# EAGLE board Orbit I_AnalougeEngine_V1_0 (EAGLE 8.4.1)
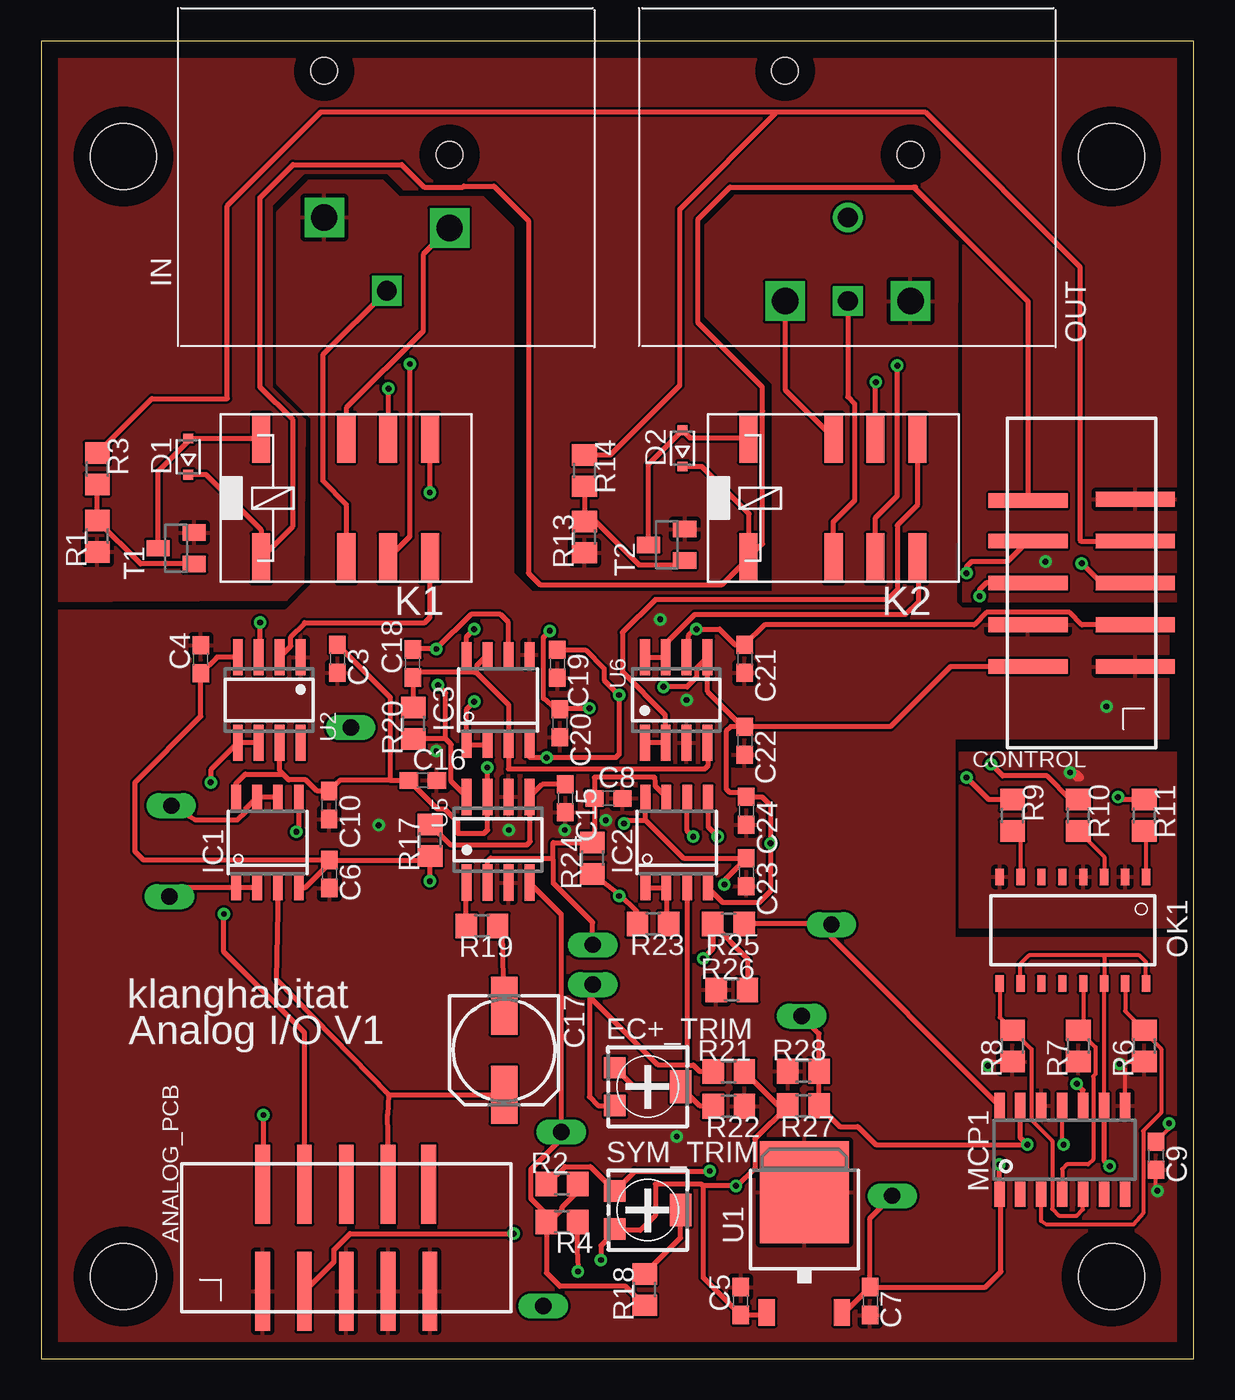
[diagram p0: board, top side]
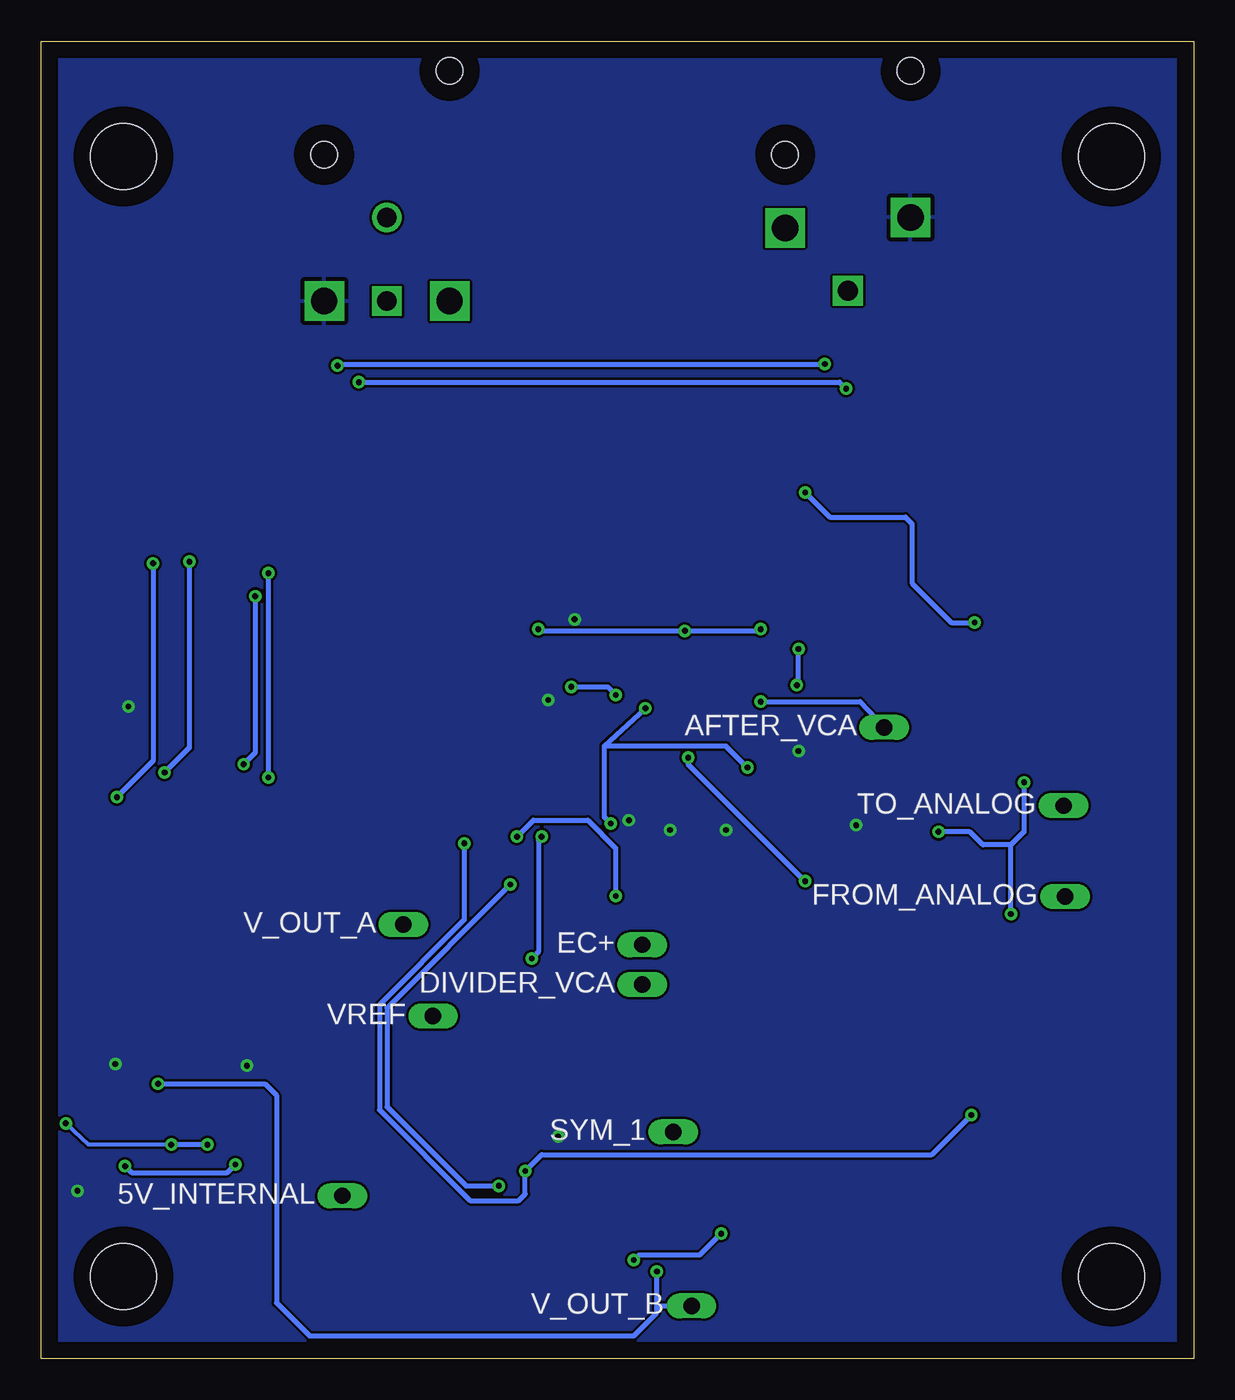
[diagram p1: board, bottom side, seen from below]

Size 70 x 80 mm. Coordinates in mm from the lower left corner, seen from the top.
Outline: 0,0 70,0 70,80 0,80 0,0
Copper layers (1*16): Top 0.035mm / dielectric 1.5mm / Bottom 0.035mm
Design rules "default": minimum track width 6mil, minimum drill 0.35mm, track to track 6mil, track to pad 6mil, pad to pad 6mil, via to via 6mil, smd to smd 6mil, copper to edge 40mil, drill to drill 6mil, minimum pad ring 10mil, minimum via ring 8mil, stop-mask expansion 4mil, vias tented up to drill 0mil, thermal gap 10mil
Holes 4 mm at 5,73 65,73 65,5 5,5

## Footprints (pad centres in the part's own frame; a part is rotated, then mirrored left to right if it is on the bottom)
THT_PIN = drill 1 long: P$1 0,0
87832-10 = smd 0.89 x 4.8: 1 -5.08,-3.251; 2 -5.08,3.249; 3 -2.54,-3.251; 4 -2.54,3.249; 5 0,-3.251; 6 0,3.249; 7 2.54,-3.251; 8 2.54,3.249; 9 5.08,-3.251; 10 5,3.249
C0603 = smd 1.1 x 1: 1 -0.85,0; 2 0.85,0
153CLV-0605 = smd 3.5 x 1.6: + 2.7,0; - -2.7,0
SOD323-R = smd 0.6 x 0.6: A 1.1,0; C -1.1,0
RTRIM4G/J = smd 1.3 x 1.3: 1 1.15,-2; 3 -1.15,-2 | smd 2 x 1.3: 2 0,2
SOIC8 = smd 0.6 x 1.5: 1 -1.905,-2.75; 2 -0.635,-2.75; 3 0.635,-2.75; 4 1.905,-2.75; 5 1.905,2.75; 6 0.635,2.75; 7 -0.635,2.75; 8 -1.905,2.75
NEUTRIK_NC3FAH = drill 1.6 square: 1 -3.81,-12.7; 2 3.81,-13.335 | drill 1.2 square: 3 0,-17.15 | hole 1.6: -3.81,-3.81; 3.81,-8.89
351 = smd 1.11 x 3: 1 -2.623,-3.645; 2 -2.623,3.645; P1 2.556,-3.645; P2 2.556,3.645; Q1 5.096,-3.645; Q2 5.096,3.645; S1 7.636,-3.645; S2 7.636,3.645
SOIC16 = smd 0.635 x 1.524: 1 -4.445,-2.695; 2 -3.175,-2.695; 3 -1.905,-2.695; 4 -0.635,-2.695; 5 0.635,-2.695; 6 1.905,-2.695; 7 3.175,-2.695; 8 3.175,2.695; 9 1.905,2.695; 10 0.635,2.695; 11 -0.635,2.695; 12 -1.905,2.695; 13 -3.175,2.695; 14 -4.445,2.695
SOIC16' = smd 1 x 0.5: 1 -3.24,4.445; 2 -3.24,3.175; 3 -3.24,1.905; 4 -3.24,0.635; 5 -3.24,-0.635; 6 -3.24,-1.905; 7 -3.24,-3.175; 8 -3.24,-4.445; 9 3.24,-4.445; 10 3.24,-3.175; 11 3.24,-1.905; 12 3.24,-0.635; 13 3.24,0.635; 14 3.24,1.905; 15 3.24,3.175; 16 3.24,4.445
NEUTRIK_NC3MAH = drill 1.6 square: 1 3.81,-17.78; 2 -3.81,-17.78 | drill 1.2 square: 3 0,-17.78 | drill 1.2: G 0,-12.7 | hole 1.6: -3.81,-3.8; 3.81,-8.89
R0805 = smd 1.3 x 1.5: 1 -0.95,0; 2 0.95,0
SOT23 = smd 1 x 1.4: 1 -0.95,-1.1; 2 0.95,-1.1; 3 0,1.1
TO252 = smd 1 x 1.6: 1 -2.28,-4.8; 3 2.28,-4.8 | smd 5.4 x 6.2: 2 0,2.5
SO08 = smd 0.6 x 2.2: 1 -1.905,-2.6; 2 -0.635,-2.6; 3 0.635,-2.6; 4 1.905,-2.6; 5 1.905,2.6; 6 0.635,2.6; 7 -0.635,2.6; 8 -1.905,2.6

## Placement (x,y rotation side)
5V_INTERNAL  TPTHT  [THT_PIN]  51.7,9.9 180 bottom
AFTER_VCA  TPTHT  [THT_PIN]  18.8,38.34 180 bottom
ANALOG_PCB  10PIN_HEADER_SMD  [87832-10]  18.53,7.35 0 top
C3  100nF  [C0603]  18,42.51 270 top
C4  100nF  [C0603]  9.7,42.47 90 top
C5  0.33uF  [C0603]  42.49,3.51 90 top
C6  100nF  [C0603]  17.51,29.43 270 top
C7  100nF  [C0603]  50.35,3.51 270 top
C8  100nF  [C0603]  34.46,34.03 0 top
C9  100nF  [C0603]  67.71,12.33 270 top
C10  100nF  [C0603]  17.49,33.62 270 top
C15  100nF  [C0603]  31.84,34.03 270 top
C16  100nF  [C0603]  23.18,35.11 0 top
C17  10uF  [153CLV-0605]  28.12,18.73 270 top
C18  100nF  [C0603]  22.58,42.22 90 top
C19  100nF  [C0603]  31.36,42.19 270 top
C20  100nF  [C0603]  31.5,38.58 270 top
C21  100nF  [C0603]  42.73,42.5 270 top
C22  100nF  [C0603]  42.73,37.54 270 top
C23  100nF  [C0603]  42.83,29.55 270 top
C24  100nF  [C0603]  42.83,33.27 270 top
CONTROL  10PIN_HEADER_SMD  [87832-10]  63.19,47.11 90 top
D1  4148  [SOD323-R]  8.94,54.78 90 top
D2  4148  [SOD323-R]  38.96,55.28 90 top
DIVIDER_VCA  TPTHT  [THT_PIN]  33.5,22.72 180 bottom
EC+  TPTHT  [THT_PIN]  33.5,25.14 180 bottom
EC+_TRIM  2k  [RTRIM4G/J]  36.84,16.52 270 top
FROM_ANALOG  TPTHT  [THT_PIN]  7.8,28.06 180 bottom
IC1  TL072  [SOIC8]  13.75,31.35 0 top
IC2  TL072  [SOIC8]  38.6,31.35 0 top
IC3  OP275  [SOIC8]  27.75,40 0 top
IN  NEUTRIK_NC3FAH  [NEUTRIK_NC3FAH]  21,82 0 top
K1  RELAY_EE2-5NU  [351]  15.98,52.26 0 top
K2  RELAY_EE2-5NU  [351]  45.58,52.26 0 top
MCP1  MCP4922  [SOIC16]  62.65,12.68 0 top
OK1  OPTOKOPPLER(4X)  [SOIC16']  62.66,26.02 270 top
OUT  NEUTRIK_NC3MAH  [NEUTRIK_NC3MAH]  49,82 0 top
R1  10k  [R0805]  3.41,49.95 90 top
R2  160k  [R0805]  31.64,10.62 0 top
R3  10k  [R0805]  3.41,54.04 270 top
R4  27k  [R0805]  31.64,8.31 180 top
R6  100k  [R0805]  67,19 90 top
R7  100k  [R0805]  63,19 90 top
R8  100k  [R0805]  59,19 90 top
R9  220  [R0805]  59,33 270 top
R10  220  [R0805]  63,33 270 top
R11  220  [R0805]  67,33 270 top
R13  10k  [R0805]  33,49.89 90 top
R14  10k  [R0805]  33,53.93 270 top
R17  5k1  [R0805]  23.63,31.49 90 top
R18  680k  [R0805]  36.65,4.2 90 top
R19  20k  [R0805]  26.77,26.29 180 top
R20  20k  [R0805]  22.61,38.58 90 top
R21  100k  [R0805]  41.77,17.44 0 top
R22  5k1  [R0805]  41.77,15.34 180 top
R23  20k  [R0805]  37.17,26.4 180 top
R24  20k  [R0805]  33.48,30.39 90 top
R25  20k  [R0805]  41.75,26.4 180 top
R26  20k  [R0805]  41.95,22.4 0 top
R27  100k  [R0805]  46.3,15.37 180 top
R28  15k  [R0805]  46.3,17.46 0 top
SYM_1  TPTHT  [THT_PIN]  31.6,13.78 180 bottom
SYM_TRIM  50k  [RTRIM4G/J]  36.85,9.04 270 top
T1  BC847  [SOT23]  8.2,49.21 90 top
T2  BC847  [SOT23]  37.99,49.42 90 top
TO_ANALOG  TPTHT  [THT_PIN]  7.9,33.58 180 bottom
U1  7805  [TO252]  46.36,7.62 0 top
U2  1240  [SO08]  13.85,40 180 top
U5  2181  [SO08]  27.75,31.51 0 top
U6  1646  [SO08]  38.57,40 0 top
V_OUT_A  TPTHT  [THT_PIN]  48,26.36 180 bottom
V_OUT_B  TPTHT  [THT_PIN]  30.5,3.22 180 bottom
VREF  TPTHT  [THT_PIN]  46.2,20.8 180 bottom

## Library data of the parts
5V_INTERNAL AFTER_VCA ANALOG_PCB C3-C10 C15-C24 CONTROL D1 D2 DIVIDER_VCA EC+ EC+_TRIM FROM_ANALOG IC1-IC3 IN OUT R1-R4 R6-R11 R13 R14 R17-R28 SYM_1 SYM_TRIM T1 T2 TO_ANALOG U1 V_OUT_A V_OUT_B VREF = C_Sager_Bibliothek
K1 K2 OK1 = C_Sager_Bibliothek; OC_FARNELL: unknown; OC_NEWARK: unknown
MCP1 = SPI
U2 U5 U6 = THAT_Library

## Nets
5VREG.: 5V_INTERNAL.P$1 C7.1 MCP1.1 MCP1.9 OK1.10 OK1.14 OK1.16 U1.3
+5V: CONTROL.10 D1.C D2.C K1.1 K2.1
AGND: ANALOG_PCB.1 ANALOG_PCB.5 ANALOG_PCB.7 ANALOG_PCB.9 C3.2 C4.2 C5.2 C6.2 C7.2 C8.2 C9.2 C10.2 C15.2 C16.2 C19.2 C20.2 C21.2 C22.2 C23.2 C24.2 CONTROL.1 CONTROL.4 IC3.5 IN.1 MCP1.8 MCP1.12 OUT.1 R6.1 R7.1 R8.1 R22.1 R26.1 R28.1 U1.2 U2.1 U5.3 U5.6 U6.3
BYPASS: CONTROL.7 R3.1 R14.1
CS: CONTROL.5 R11.1
DGND: CONTROL.9 OK1.2 OK1.4 OK1.8 R1.1 R13.1 T1.2 T2.2
FROM_ANALOG_PCB: ANALOG_PCB.8 C17.+ IC1.3
N$1: K1.S1 U2.2
N$2: K1.S2 U2.3
N$3: D2.A K2.2 T2.3
N$4: R13.2 R14.2 T2.1
N$5: C17.- R19.1
N$6: D1.A K1.2 T1.3
N$8: K1.Q1 K2.Q1
N$9: MCP1.3 OK1.15 R6.2
N$10: R1.2 R3.2 T1.1
N$11: K1.Q2 K2.Q2
N$12: MCP1.4 OK1.13 R7.2
N$13: MCP1.5 OK1.9 R8.2
N$15: OK1.7 R9.2
N$16: OK1.3 R10.2
N$17: OK1.1 R11.2
N$19: MCP1.10 R4.1 V_OUT_B.P$1
N$20: R18.2 SYM_TRIM.2
N$21: IN.2 K1.P2
N$22: IN.3 K1.P1
N$23: K2.P2 OUT.2
N$24: K2.P1 OUT.3
N$26: C15.1 R17.2 U5.5
N$29: C18.2 IC3.6 R20.1 U5.8
N$30: C18.1 IC3.3 IC3.7 R20.2 U6.4
N$34: R19.2 U5.1
N$35: DIVIDER_VCA.P$1 EC+_TRIM.1 IC2.3 R21.1
N$36: IC2.1 IC2.2 R23.1
N$37: IC2.5 R23.2 R24.1
N$38: C8.1 EC+.P$1 IC2.7 R24.2 U5.2
N$39: IC2.6 R25.2 R26.2
N$40: EC+_TRIM.2 EC+_TRIM.3 R22.2
N$41: MCP1.14 R25.1 V_OUT_A.P$1
N$42: C9.1 MCP1.11 MCP1.13 R27.1 R28.2 VREF.P$1
OUT+: K2.S1 U6.7 U6.8
OUT-: K2.S2 U6.1 U6.2
SCK: CONTROL.6 R10.1
SDI: CONTROL.8 R9.1
SIGNAL_AFTER_VCA: AFTER_VCA.P$1 IC3.1 IC3.2
SIGNAL_FROM_ANALOG: FROM_ANALOG.P$1 IC1.1 IC1.2
SIGNAL_TO_ANALOG_PCB: IC1.6 IC1.7 TO_ANALOG.P$1
SYM: R2.2 R4.2 R18.1 SYM_1.P$1 U5.4
TO_ANALOG_PCB: ANALOG_PCB.4 IC1.5 U2.5 U2.6
V+: ANALOG_PCB.3 C3.1 C5.1 C10.1 C16.1 C20.1 C21.1 C23.1 CONTROL.3 IC1.8 IC2.8 IC3.8 R21.2 R27.2 SYM_TRIM.1 U1.1 U2.7 U5.7 U6.6
V-: ANALOG_PCB.2 C4.1 C6.1 C19.1 C22.1 C24.1 CONTROL.2 IC1.4 IC2.4 IC3.4 R2.1 R17.1 SYM_TRIM.3 U2.4 U6.5

## Tracks (layer width: path | path; a pad name or v marks a point on that pad's centre or on a via)
5VREG.  (via drill 0.35)
  Top 0.254: OK1.10 59.48,23.98 60,24.5 64.5,24.5 | 64.5,24.5 64.56,24.43 OK1.14 64.55,22.77 MCP1.9 | OK1.16 67.11,24.09 66.7,24.5 64.5,24.5
  Top 0.305: U1.3 48.81,2.82 C7.1 | C7.1 57.36,4.36 58.3,5.3 58.3,9.89 MCP1.1 v58.2,11.8 | MCP1.9 64.55,12.05 v64.9,11.7 | C7.1 50.35,8.55 5V_INTERNAL.P$1
  Bottom 0.305: v64.9,11.7 64.5,11.3 58.7,11.3 v58.2,11.8
+5V
  Top 0.305: D2.C 40.12,54.18 43,51.3 43,48.66 K2.1 | K2.1 43.82,49.48 43.82,57.53 43.8,57.55 43.8,59 39.9,62.9 39.9,69.2 41.84,71.14 53,71.14 | 53,71.14 53.1,71.14 | D1.C 10.02,53.68 13.36,50.34 K1.1 15.3,50.56 15.3,57 13.3,59 13.3,70.5 15.3,72.5 21.9,72.5 23.26,71.14 25.62,71.14 25.68,71.2 27.5,71.2 29.6,69.1 29.6,47.7 30.3,47 41.34,47 K2.1 | CONTROL.10 59.94,64.2 53,71.14
AGND  (via drill 0.35)
  Top 0.254: v57.5,17.8 57.75,18.05 R8.1 | R6.1 65.65,18.05 v65.5,17.9 65.82,17.58 MCP1.8 | v67.8,10.2 67.71,10.29 C9.2
  other vias: 64.7,39.6 37.6,44.9 39.2,40 31.8,32.1 38.6,13.5 24,36.9 28.4,32.1 34.3,32.7 20.5,32.4
  pour Bottom: -1,81 71,81 71,-1 -1,-1
  pour Top: 16.3,71.5 20.7,71.5 21.7,70.5 26.8,70.5 28.6,68.7 28.6,47.7 29.8,46.5 44.5,46.5 44.5,59.2 40.4,63.3 40.4,68.8 42.2,70.6 52.8,70.6 55.6,67.8 55.5,45.9 55.9,45.5 67.7,45.5 68.4,44.8 68.4,37.7 55.4,37.7 55.4,25.5 70.3,25.5 70.4,25.6 70.4,-0.7 70.3,-0.8 -0.4,-0.8 -0.6,-1 -0.6,45.2 -0.4,45.4 14.9,45.4 16.5,47 16.5,57.1 14.4,59.2 14.4,69.6
BYPASS
  Top 0.305: R14.1 34.58,54.88 38.8,59.1 38.8,69.8 44.7,75.7 | 44.7,75.7 53.7,75.7 63.1,66.3 63.1,49.7 63.15,49.65 CONTROL.7 | R3.1 6.72,58.3 11.3,58.3 11.3,70 17,75.7 44.7,75.7
CS  (via drill 0.35)
  Top 0.305: CONTROL.5 64.39,47.11 v63.2,48.3 | R11.1 65.55,33.95 v65.4,34.1
  Bottom 0.305: v63.2,48.3 63.2,36.3 v65.4,34.1
DGND  (via drill 0.35)
  Top 0.305: v62.5,35.6 62.9,35.6 63.2,35.3 63.1,35.2 62.9,35.2 v62.5,35.6
  Bottom 0.305: v61,48.4 61,37.1 v62.5,35.6
  pour Top: 72,46 56,46 56,68 53,71 42,71 40,69 40,63 44,59 44,47 30,47 29,48 29,69 27,71 22,71 21,72 16,72 14,70 14,59 16,57 15.9,47.1 14.9,46.1 -1,46 -1,83 72,83
  pour Top: 71.2,36.8 55.8,36.8 55.8,26.2 71,26.2 71.2,26.3
FROM_ANALOG_PCB
  Top 0.305: ANALOG_PCB.8 21.07,13.57 21.03,14.83 21.1,16.03 | 21.1,16.03 C17.+ | IC1.3 14.28,23.05 21.1,16.03
N$1
  Top 0.305: U2.2 15.15,43.27 15.15,43.83 16,44.67 16,44.7 23.3,44.7 23.62,45.02 K1.S1
N$2  (via drill 0.35)
  Top 0.305: K1.S2 23.6,55.89 v23.6,52.6 23.6,52.5 | U2.3 13.3,42.68 v13.3,44.7
  Bottom 0.305: v23.6,52.6 22.1,51.1 17.5,51.1 17.1,50.7 17.1,47.1 14.7,44.7 v13.3,44.7
N$3
  Top 0.305: K2.2 39.44,55.91 D2.A 36.89,54.31 T2.3
N$4
  Top 0.305: R14.2 R13.2 33.66,50.84 36.3,48.2 38.82,48.2 T2.1
N$5
  Top 0.305: C17.- 28.02,25.99 R19.1
N$6
  Top 0.305: 9.1,55.91 K1.2 | 9.1,55.91 8.96,55.91 D1.A | T1.3 7.1,53.9 9.1,55.91
N$8  (via drill 0.35)
  Top 0.305: K2.Q1 50.68,51.08 52,52.4 v52,60.3 | K1.Q1 22.4,49.94 v22.4,60.4
  Bottom 0.305: v52,60.3 51.9,60.4 v22.4,60.4
N$9
  Top 0.254: OK1.15 65.83,21.11 R6.2 67,19.84 68.03,18.82 68.03,14.94 66.93,13.84 66.93,8.83 66.34,8.14 61.06,8.14 60.74,8.36 MCP1.3
N$10
  Top 0.305: T1.1 6.04,48.26 R1.2 R3.2
N$11  (via drill 0.35)
  Top 0.305: K2.Q2 50.68,59.28 v50.7,59.3 | K1.Q2 21.1,55.93 v21.1,58.9
  Bottom 0.305: v50.7,59.3 21.5,59.3 v21.1,58.9
N$12
  Top 0.254: OK1.13 63.3,20.25 R7.2 64.03,18.92 64.03,17.28 63.9,17.16 63.9,12.1 63.6,11.8 62.3,11.8 62.01,11.51 MCP1.4 62.01,10.51
N$13
  Top 0.254: OK1.9 58.22,20.73 R8.2 60.14,18.81 60.14,14.5 61.41,13.23 61.41,9.11 61.82,8.7 62.9,8.7 63.28,9.08 MCP1.5
N$15
  Top 0.254: R9.2 59.48,31.57 OK1.7
N$16
  Top 0.254: R10.2 64.56,30.48 OK1.3
N$17
  Top 0.254: R11.2 67.11,31.95 OK1.1
N$19  (via drill 0.35)
  Top 0.305: MCP1.10 63.28,16.32 v62.9,16.7 | R4.1 32.59,6.31 v32.6,5.3
  Bottom 0.305: v62.9,16.7 56.4,16.7 55.7,16 55.7,3.4 53.7,1.4 34,1.4 32.6,2.8 32.6,3.1 | 32.6,3.1 v32.6,5.3 | 32.6,3.1 32.48,3.22 V_OUT_B.P$1
N$20
  Top 0.305: R18.2 38.85,7.34 SYM_TRIM.2
N$21
  Top 0.305: IN.2 23.2,67.06 23.2,62.4 18.54,57.74 K1.P2
N$22
  Top 0.305: IN.3 17.1,60.95 17.1,53.3 18.54,51.86 K1.P1
N$23
  Top 0.305: OUT.2 45.19,58.85 K2.P2
N$24
  Top 0.305: OUT.3 49,58.4 49.4,58 49.4,52.1 48.1,50.8 48.1,48.65 K2.P1
N$26
  Top 0.305: C15.1 30.42,34.88 U5.5 | U5.5 29.66,33.36 | R17.2 24.87,31.2 29.5,31.2 29.7,31.4 29.7,34.07 U5.5
N$29  (via drill 0.35)
  Top 0.305: IC3.6 28.39,44.71 27.9,45.2 26.1,45.2 v24,43.1 22.61,43.1 C18.2 | U5.8 24.9,35.06 24.9,37.3 24.57,37.63 | 24.57,37.63 R20.1 | 24.57,37.63 24.57,40.43 v24.1,40.9
  Bottom 0.305: v24.1,40.9 24,41 v24,43.1
N$30
  Top 0.305: U6.4 40.5,37.78 40.5,36 40.3,35.8 28.4,35.8 28.39,35.81 28.39,37.1 | 28.39,37.1 IC3.3 | 26.27,41.7 26.45,41.87 26.45,42.09 IC3.7 | 26.27,41.7 22.91,41.7 C18.1 22.61,41.33 R20.2 | 26.27,41.7 26.41,41.7 28.4,39.7 28.39,39.69 28.39,37.1
N$34
  Top 0.305: R19.2 25.82,28.89 U5.1
N$35
  Top 0.305: R21.1 40.01,17.44 39.62,17.83 39.2,17.83 | 39.2,17.83 37.47,17.83 33.5,21.8 DIVIDER_VCA.P$1 33.3,22.22 33.3,15.9 33.83,15.37 EC+_TRIM.1 | IC2.3 39.24,17.87 39.2,17.83
N$36
  Top 0.305: IC2.1 IC2.2 37.97,26.55 R23.1
N$37  (via drill 0.35)
  Top 0.305: IC2.5 40.51,32.29 v41.1,31.7 | 35.1,28.22 R24.1 | 35.1,28.22 v35.1,28.1 | R23.2 36.22,27.1 35.1,28.22
  Bottom 0.305: v41.1,31.7 40.1,32.7 36.8,32.7 35.1,31 v35.1,28.1 35.1,28
N$38
  Top 0.305: IC2.7 37.3,34.77 37.3,34.98 37.28,35.3 33.6,35.3 33.61,35.31 C8.1 33.61,31.81 R24.2 31.1,31.34 31.1,30.3 | 27.12,29.82 U5.2 27.12,30.22 27.3,30.4 31,30.4 31.1,30.3 | EC+.P$1 33.5,26.5 31.1,28.9 31.1,30.3
N$39  (via drill 0.35)
  Top 0.305: R26.2 42.9,24.3 R25.2 40.8,24.9 v40.2,24.3 | IC2.6 39.2,34.06 39.2,32.1 v39.6,31.7
  Bottom 0.305: v39.6,31.7 39.8,31.5 39.8,24.7 v40.2,24.3
N$40
  Top 0.305: R22.2 40.03,15.34 EC+_TRIM.2 35.99,16.52 EC+_TRIM.3
N$41
  Top 0.305: MCP1.14 47.18,26.4 46.8,26.4 | 46.8,26.4 R25.1 | V_OUT_A.P$1 46.84,26.36 46.8,26.4
N$42  (via drill 0.35)
  Top 0.254: C9.1 68.5,13.97 v68.5,14.3 | v62.1,13 62.01,13.09 MCP1.11
  Top 0.305: MCP1.13 59.47,13.43 v59.9,13 50.7,13 49.6,14.1 48.51,14.1 R27.1 R28.2 47.25,19.75 VREF.P$1
  Bottom 0.254: v68.5,14.3 67.1,13 62.2,13 v62.1,13
  Bottom 0.305: v59.9,13 62.2,13
OUT+
  Top 0.305: K2.S1 53.3,48.53 53.3,46 52.5,45.2 39.7,45.2 37.94,43.44 U6.7 U6.8
OUT-
  Top 0.305: K2.S2 53.22,51.82 52,50.6 52,46.7 51.4,46.1 37.3,46.1 35.3,44.1 35.3,41.7 37.9,39.1 37.9,37.44 U6.2 U6.1
SCK  (via drill 0.35)
  Top 0.305: CONTROL.6 57.41,47.11 57,46.7 v57,46.3 | R10.1 62.55,33.95 61.1,35.4 58.4,35.4 v57.7,36.1
  Bottom 0.305: v57,46.3 57,36.8 v57.7,36.1
SDI  (via drill 0.35)
  Top 0.305: CONTROL.8 58.7,48.4 56.5,48.4 56.2,48.1 v56.2,47.7 | R9.1 57.55,33.95 v56.2,35.3
  Bottom 0.305: v56.2,47.7 v56.2,35.3
SIGNAL_AFTER_VCA  (via drill 0.35)
  Top 0.305: IC3.2 IC3.1 25.85,39.45 v26.3,39.9
  Bottom 0.305: AFTER_VCA.P$1 20.26,39.9 v26.3,39.9
SIGNAL_FROM_ANALOG
  Top 0.305: IC1.2 IC1.1 8.34,28.6 FROM_ANALOG.P$1
SIGNAL_TO_ANALOG_PCB
  Top 0.305: IC1.6 IC1.7 12.45,33.44 12.45,33.23 11.92,32.7 9.38,32.7 TO_ANALOG.P$1
SYM
  Top 0.305: R18.1 35.5,4.4 31.5,4.4 30.69,5.21 30.69,8.1 | 30.69,8.1 R4.2 | 30.89,8.31 31.63,9.04 31.63,9.19 32.59,10.14 R2.2 | 30.89,8.31 30.69,8.1 | U5.4 31.6,26.97 31.6,13.8 | 30.89,8.31 30.89,8.58 29.73,9.74 29.73,11.49 31.6,13.36 31.6,13.8 | SYM_1.P$1 31.6,13.8
TO_ANALOG_PCB  (via drill 0.35)
  Top 0.305: U2.6 U2.5 10.3,35.75 v10.3,35 | IC1.5 15.65,32.15 v15.5,32 | ANALOG_PCB.4 15.99,19.81 11.1,24.7 v11.1,27
  Bottom 0.305: v10.3,35 10.3,32 11.1,31.2 | 11.1,31.2 12.8,31.2 13.6,32 v15.5,32 15.6,32 | v11.1,27 11.1,31.2
V+  (via drill 0.35)
  Top 0.305: U1.1 43.91,2.66 C5.1 40.2,4.95 40.2,10.5 | 40.2,10.5 40.1,10.6 37.3,10.6 37.3,8.7 36.4,7.8 34.93,7.8 | 34.93,7.8 SYM_TRIM.1 | ANALOG_PCB.3 17.78,5.89 17.78,6.62 18.75,7.6 v28.7,7.6 28.8,7.6 | 34.93,7.8 34,6.87 v34,6 | 40.2,10.5 v42.2,10.5 42.3,10.5 43.35,11.55 43.35,13.35 45.35,15.35 R27.2 44.79,15.37 R21.2 | IC2.8 36.7,32.7 | 36.7,32.7 39,30.4 C23.1 41.5,29.07 v41.5,28.8 | U6.6 39.3,42.69 39.3,43.9 39.7,44.3 v39.8,44.3 41.2,44.3 42.15,43.35 C21.1 43.95,44.57 56.67,44.57 57.42,45.32 62.47,45.32 63.22,44.57 CONTROL.3 | v30.9,44.2 30.5,43.8 30.5,40.1 31.27,39.43 C20.1 31.57,39.5 v33.3,39.5 33.4,39.5 | IC3.8 25.85,43.85 v26.3,44.3 | v35.4,32.5 35.6,32.7 36.7,32.7 | v27.1,35.9 27.12,35.88 U5.7 27.12,32.12 26.9,31.9 25.3,31.9 25.3,32.6 24.5,33.4 24.05,33.4 C16.1 21.2,35.11 | 21.2,35.11 18.13,35.11 C10.1 16.76,34.47 16.08,35.16 15.04,35.16 14.7,35.5 | U2.7 14.49,35.71 14.7,35.5 | IC1.8 11.84,34.94 12.4,35.5 14.7,35.5 | C3.1 21.2,40.16 21.2,35.11
  Bottom 0.305: v28.7,7.6 30,6.3 33.7,6.3 v34,6 | v41.5,28.8 49,21.3 49,15.3 44.2,10.5 v42.2,10.5 | v39.8,44.3 39.7,44.2 v30.9,44.2 26.4,44.2 v26.3,44.3 | 35.8,37.2 v33.3,39.5 | 35.8,37.2 35.8,32.9 v35.4,32.5 | v27.1,35.9 28.4,37.2 35.8,37.2
V-  (via drill 0.35)
  Top 0.305: R2.1 30.75,10.62 31.81,11.67 33.36,11.67 33.54,11.49 SYM_TRIM.3 36.06,11.4 v40.6,11.4 | 42.6,38.39 C22.1 51.59,38.39 55.23,42.03 CONTROL.2 | 42.6,38.39 41.89,38.39 41.6,38.1 41.6,34.6 41.8,34.4 42.55,34.4 C24.1 43.78,34.12 44.3,33.6 v44.3,31.3 44.3,28.4 43.6,27.7 41.41,27.7 IC2.4 | 42.6,38.39 40.48,40.51 U6.5 39.81,41.94 39.81,41.37 39.24,40.8 v37.8,40.8 | C19.1 33.06,43.04 34.2,41.9 34.2,41.2 v35.1,40.3 35.1,36.7 34.9,36.5 v30.7,36.5 29.7,36.5 29.66,36.54 IC3.4 | v23.6,29 23.6,30.51 R17.1 23.37,30.28 17.7,30.28 | ANALOG_PCB.2 13.5,10.65 v13.5,14.8 | 17.7,30.28 C6.1 6.22,30.28 5.7,30.8 5.7,35 9.7,39 C4.1 10.68,42.6 U2.4 | IC1.4 16.02,28.6 17.7,30.28
  Bottom 0.305: v37.8,40.8 35.6,40.8 v35.1,40.3 | v44.3,31.3 44.3,26.65 49.46,21.49 49.46,15.11 43.95,9.6 41,9.6 40.6,10 v40.6,11.4 39.6,12.4 15.9,12.4 v13.5,14.8 | v23.6,29 30.7,36.1 v30.7,36.5

## Text on the board
tNames: klanghabitat | Analog I/O V1